# Altium PCB minibot_v1.PcbDoc (part 1 of 2)
Units mm, origin at the board's own origin, x right, y up, seen from the top; angles counter-clockwise.
Board outline 80 x 98 mm, 6 copper layers (Top Layer, GND, PWR, SIG2, GND2, Bottom Layer), stack 1.583 mm thick; 97 components, 104 nets, 461 pads, 159 vias.
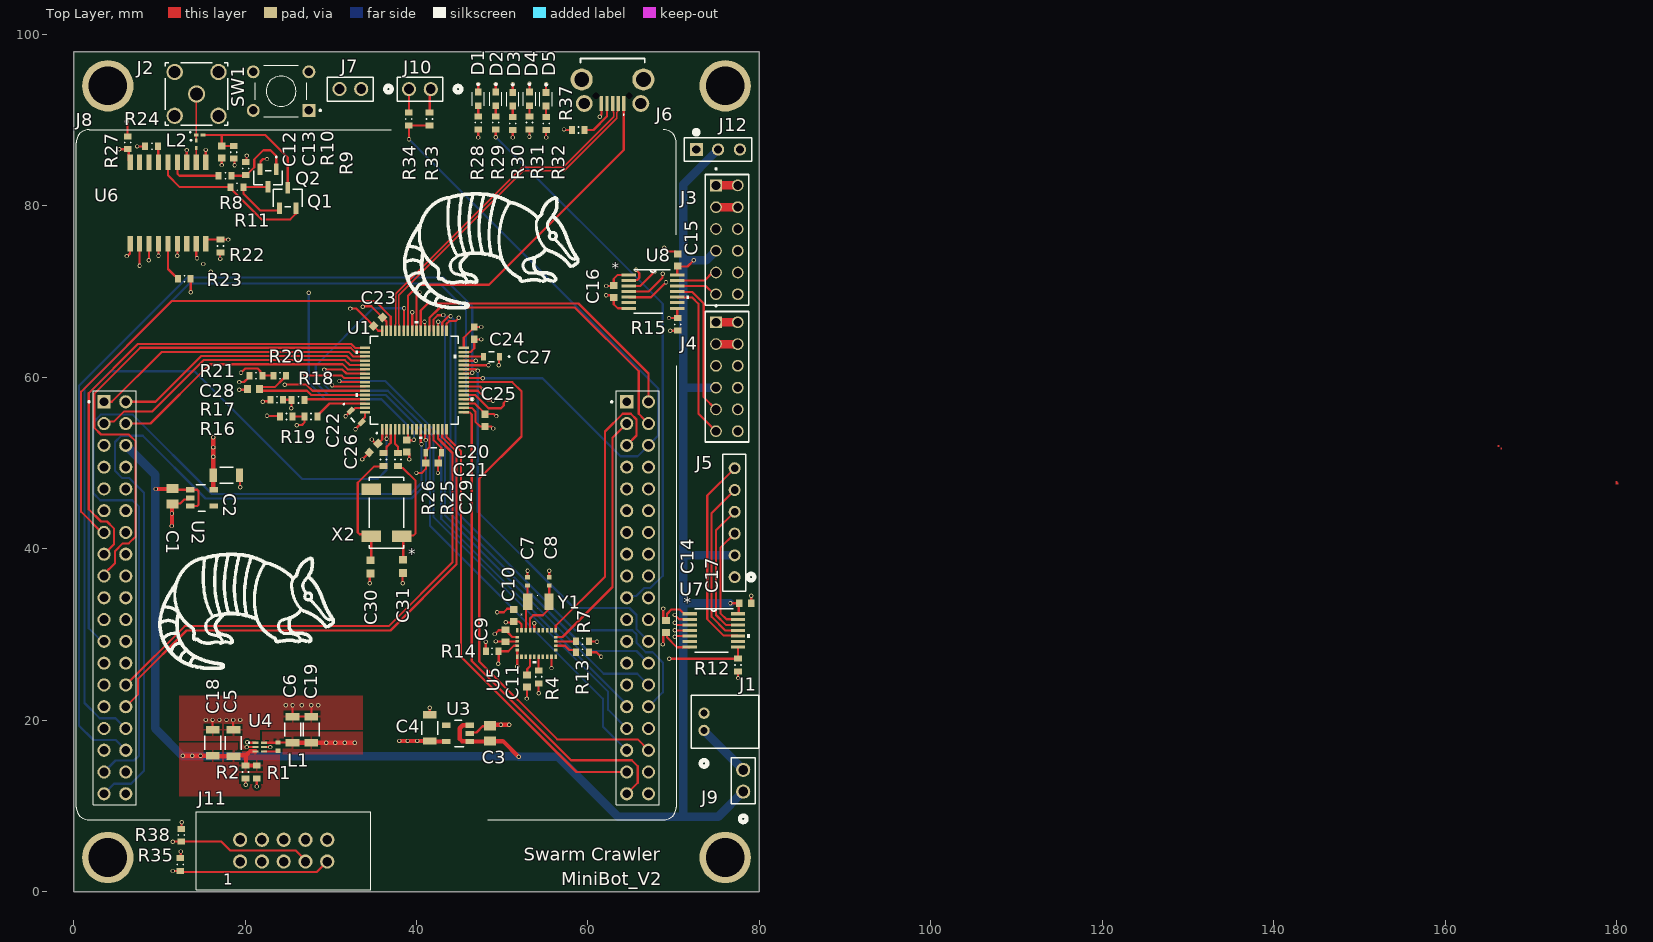
[diagram p0: Top Layer view]
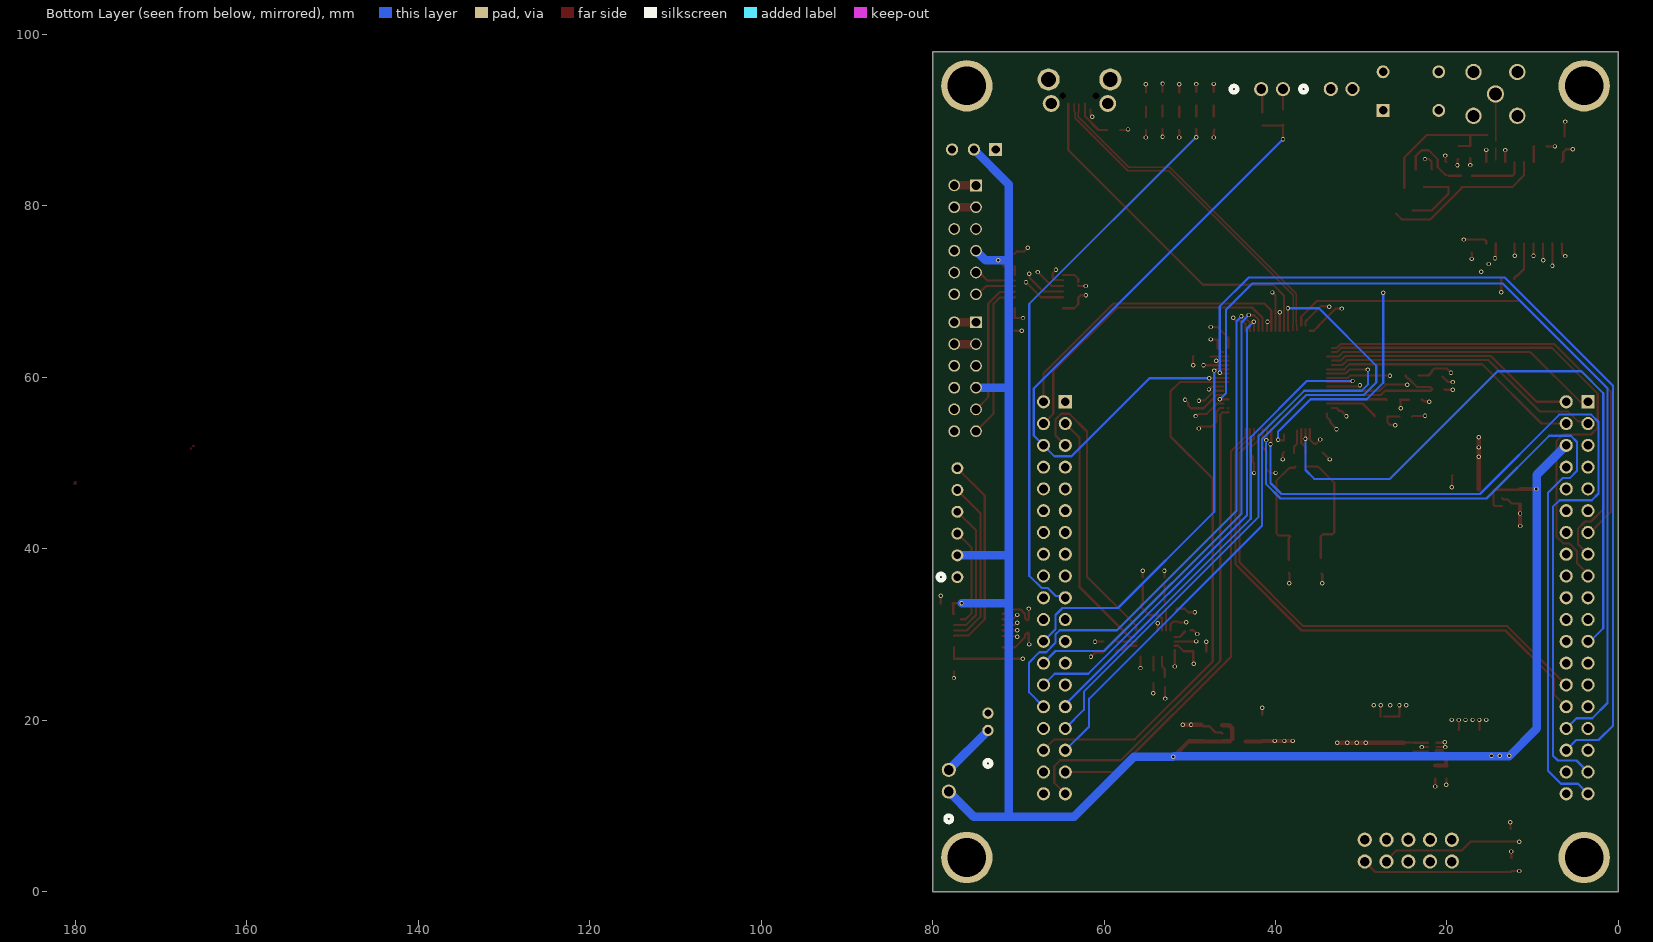
[diagram p1: Bottom Layer view, seen from below]
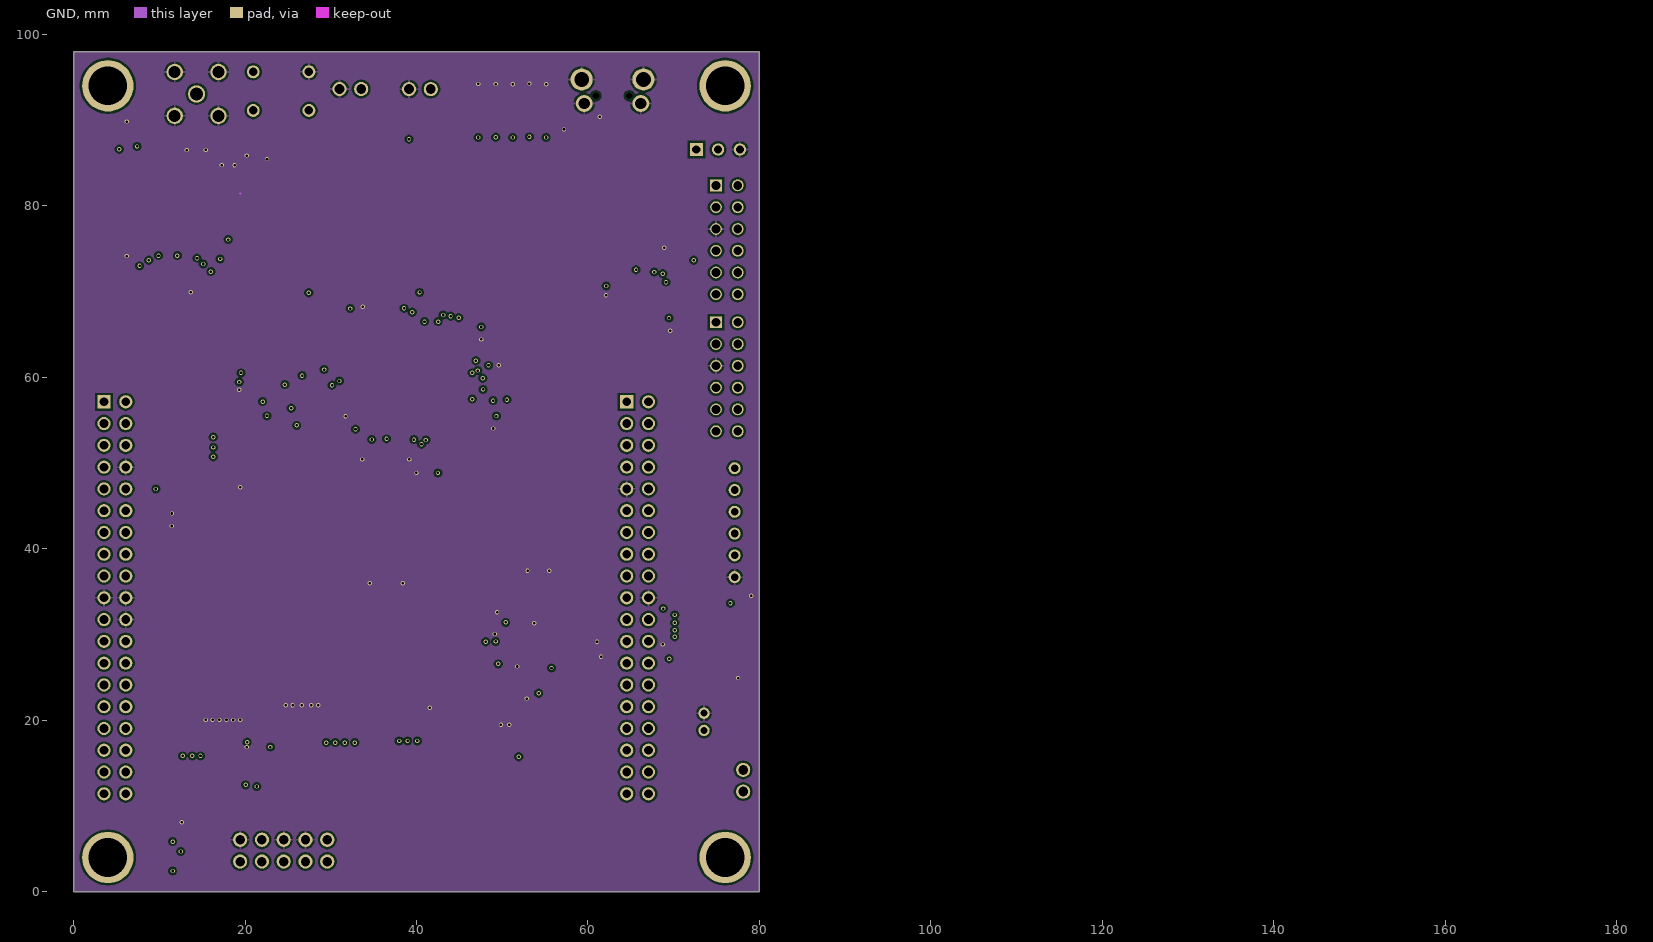
[diagram p2: GND]
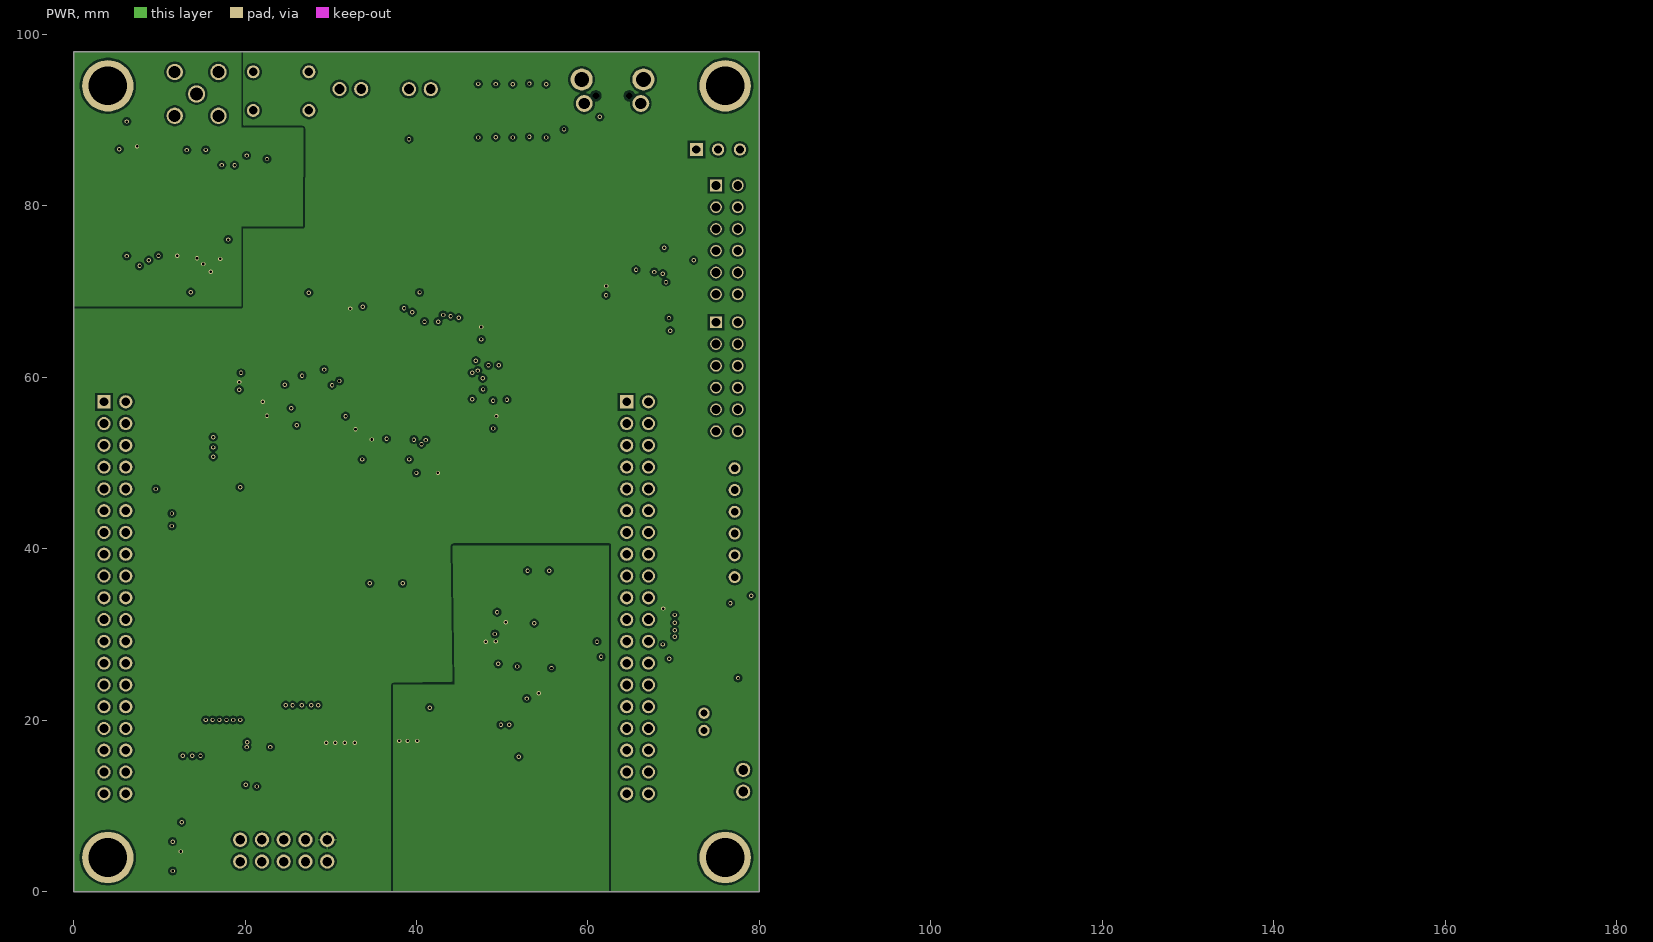
[diagram p3: PWR]
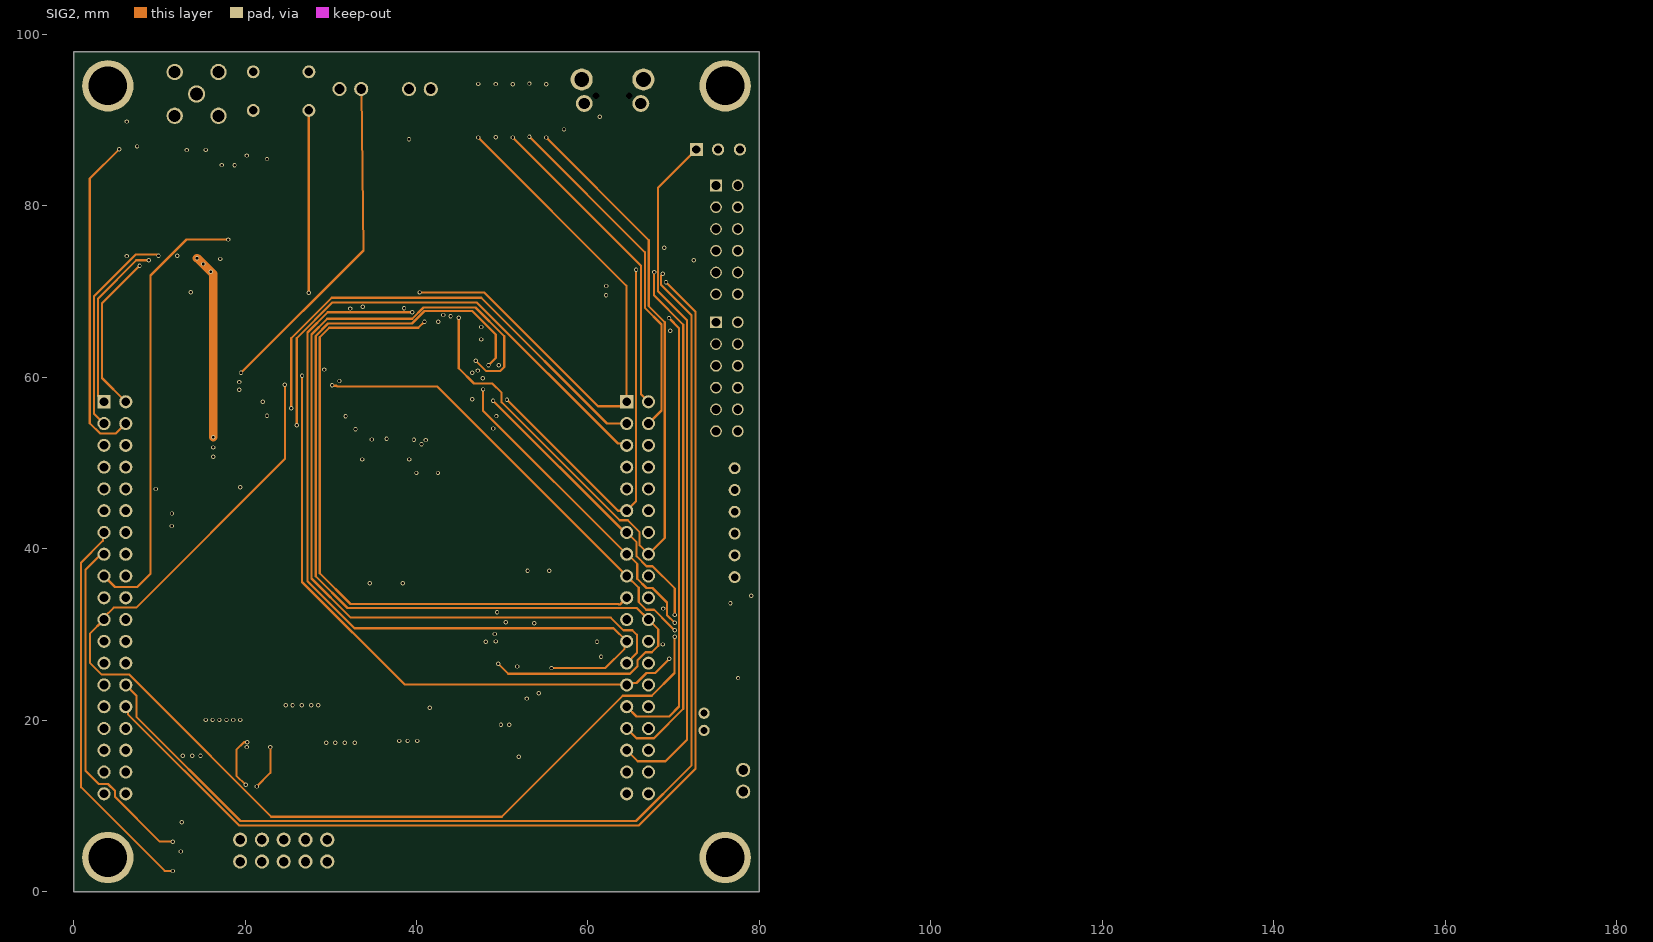
[diagram p4: SIG2]
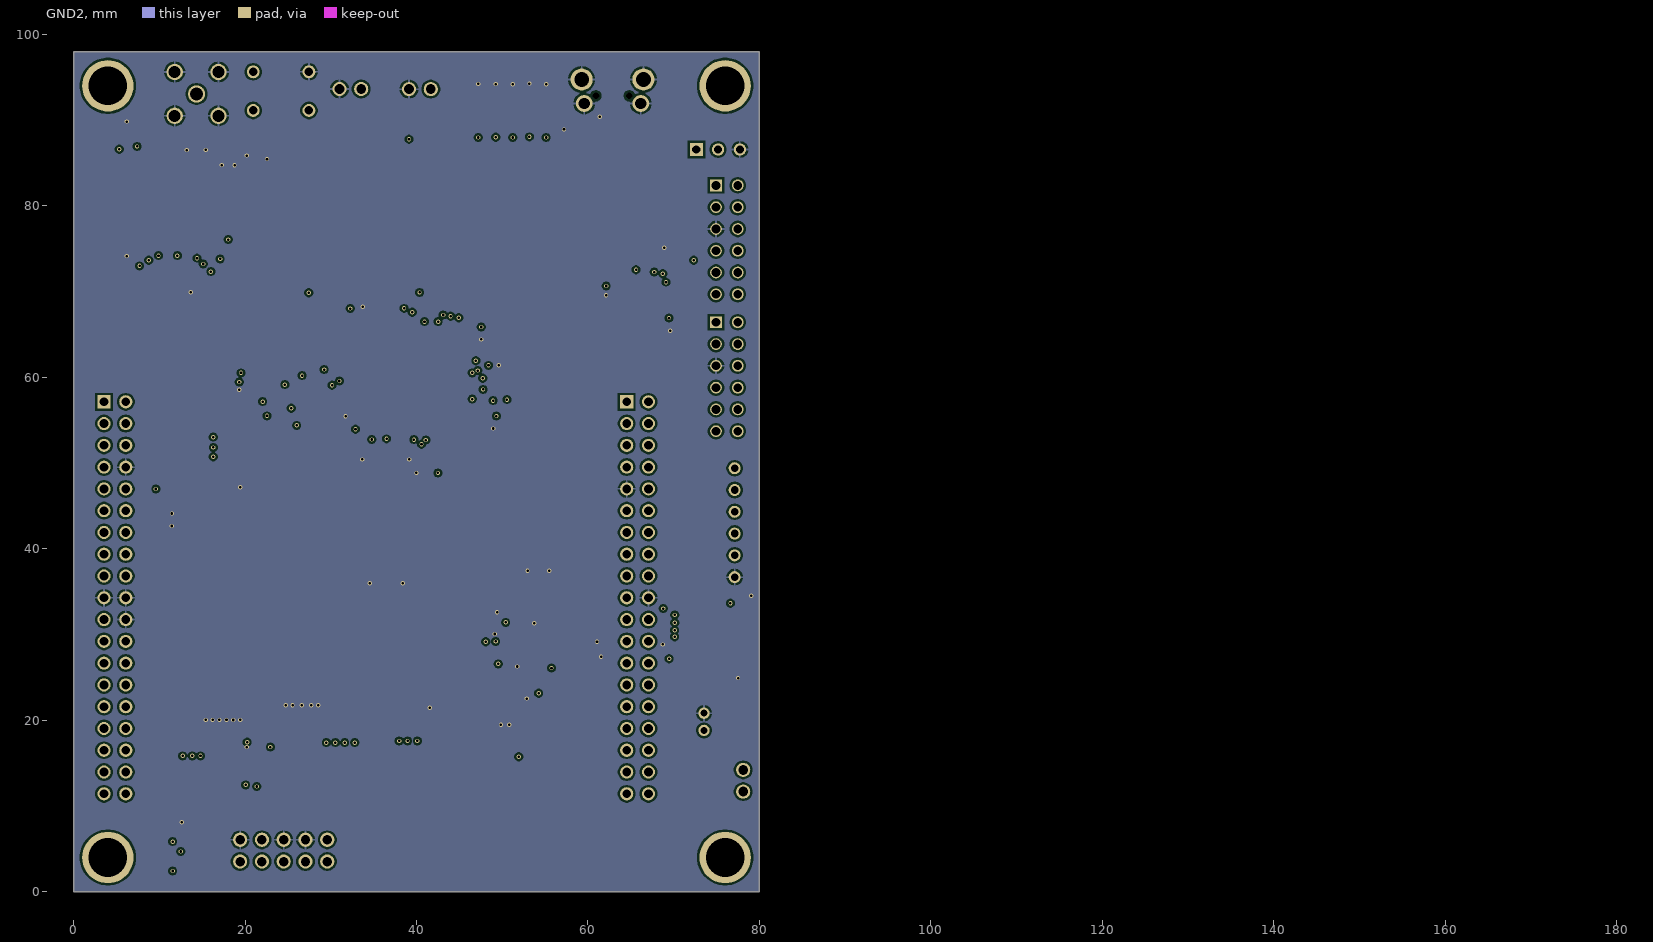
[diagram p5: GND2]

## Layer stack, top to bottom
Top Solder: solder mask 0.0102, Solder Resist, Dk 3.5
Top Layer: signal copper 0.0356
Dielectric 1: prepreg 0.2032, PP-006, Dk 4.1
GND: signal copper 0.035
Dielectric 2: core 0.381, PP-006, Dk 4.8
PWR: signal copper 0.035
Dielectric 3: prepreg 0.2032, FR-4, Dk 4.1
SIG2: signal copper 0.035
Dielectric 4: core 0.381, PP-006, Dk 4.8
GND2: signal copper 0.035
Dielectric 5: prepreg 0.2032, PP-006, Dk 4.1
Bottom Layer: signal copper 0.0356
Bottom Solder: solder mask 0.0102, Solder Resist, Dk 3.5

## Board outline
0,0 80,0 80,98 0,98

## Design rules (kind name [scope] priority, off if disabled: settings)
Clearance [All] p1: gap=0.254 ignorepadtopadclearanceinfootprint=FALSE except(0: Arc-Hole Track-Hole SMDPad-Hole THPad-Hole Via-Hole Fill-Hole Poly-Hole Region-Hole Text-Hole; 0.127: Arc-Arc Arc-Track Track-Track SMDPad-SMDPad; 0.152: SMDPad-Via; 0.2: Arc-SMDPad Track-SMDPad; 0.33: Arc-THPad Track-THPad; 0.5: THPad-THPad)
DiffPairsRouting [All] p1: maxlimit=0.254 minlimit=0.254 mostfreqgap=0.254 toplayer_mingap=0 toplayer_prefgap=0.127 toplayer_minwidth=0 toplayer_maxwidth=0.381 toplayer_prefwidth=0.254 midlayer1_minwidth=0.381 midlayer1_maxwidth=0.381 midlayer1_prefwidth=0.381 midlayer2_minwidth=0.381 midlayer2_maxwidth=0.381 midlayer2_prefwidth=0.381 midlayer3_minwidth=0.381 midlayer3_maxwidth=0.381 midlayer3_prefwidth=0.381 midlayer4_minwidth=0.381 midlayer4_maxwidth=0.381 midlayer4_prefwidth=0.381 bottomlayer_mingap=0 bottomlayer_minwidth=0 bottomlayer_maxwidth=0.381 bottomlayer_prefwidth=0.381 maxuncoupledlength=12.7
HoleSize HoleSize_2 [All] p1: absolutevalues=TRUE maxlimit=6.2 minlimit=0.2 maxpercent=80.000 minpercent=20.000
HoleSize [IsVia] p2: absolutevalues=TRUE maxlimit=6.2 minlimit=0.2 maxpercent=80.000 minpercent=20.000
MatchedLengths [All] p1: tolerance=25.4 checknetsindiffpair=TRUE checkdiffpairvsdiffpair=FALSE checkxsignals=FALSE checkothers=FALSE
MinimumAnnularRing [All] p1: minimumring=0.1
MinimumSolderMaskSliver [All] p1: minsoldermaskwidth=0.05
PolygonConnect [All] p1: thpad.connectstyle=Relief thpad.reliefconductorwidth=0.254 thpad.reliefentries=4 thpad.polygonreliefangle="90 Angle" thpad.airgapwidth=0.254 smdpad.connectstyle=Relief smdpad.reliefconductorwidth=0.254 smdpad.reliefentries=4 smdpad.polygonreliefangle="90 Angle" smdpad.airgapwidth=0.254 via.connectstyle=Direct via.reliefconductorwidth=0.254 via.reliefentries=4 via.polygonreliefangle="90 Angle" via.airgapwidth=0.254
RoutingVias [All] p1: holewidth=0.3 width=0.5 viastyle="Through Hole" minholewidth=0.2 minwidth=0.4 maxholewidth=6.35 maxwidth=6.35
SilkToSilkClearance [All] p1: silktosilkclearance=0.1
SolderMaskExpansion [All] p1: expansion=0.05 istentingtop=FALSE
Width [All] p1: maxlimit=1 minlimit=0.09 preferedwidth=0.254
26 further rules are at their usual default settings.

## Classes and differential pairs
component class Nucleo: J8
component class Sensor: C7 C8 C9 C10 C11 C12 C13 L2 Q1 Q2 R4 R7 R8 R9 R10 R11 R13 R14 R22 R23 R24 R27 U5 U6 Y1
component class Power: C1 C2 C3 C4 C5 C6 C14 C15 C16 C17 C18 C19 L1 R1 R2 R12 R15 U2 U3 U4 U7 U8
component class microController: C20 C21 C22 C23 C24 C25 C26 C27 C28 C29 C30 C31 J7 R16 R17 R18 R19 R20 R21 R25 R26 SW1 U1 X2
component class Connectors: D1 D2 D3 D4 D5 J1 J2 J3 J4 J5 J6 J9 J10 J11 J12 R28 R29 R30 R31 R32 R33 R34 R35 R37 R38
differential pair D: +D_P -D_N

## Components (designator, comment, footprint, x,y, rotation, side; value= is the part's Value field where it differs from the comment)
C1 "GRM21BR71C475KE51L" CAP_GRM0805_2X1P25_MUR 11.525,46.128 r90 top
C2 "CL31B106KOHNNWE" CAP_CL31_SAM 17.834,48.578 r180 top
C3 "GRM21BR71C475KE51L" CAP_GRM0805_2X1P25_MUR 48.546,18.474 r270 top
C4 "CL31B106KOHNNWE" CAP_CL31_SAM 41.561,19.124 r270 top
C5 "CL31B106KOHNNWE" CAP_CL31_SAM 18.65,17.357 r270 top
C6 "CL31B106KOHNNWE" CAP_CL31_SAM 25.55,18.908 r270 top
C7 "CBR04C220F5GAC" CAPC10555_55N_KEM 52.95,36.204 r90 top
C8 "CBR04C220F5GAC" CAPC10555_55N_KEM 55.475,36.202 r90 top
C9 "0603" 1608[0603] 50.374,29.858 r270 top value=100nF
C10 "0603" 1608[0603] 51.354,32.212 r270 top value=120nF
C11 "0603" 1608[0603] 52.899,24.592 r90 top value=1uF
C12 "C0603C0G1E270J030BA" CAP_0603_TDK 14.313,87.184 r270 top
C13 "0603" 1608[0603] 17.284,86.275 r90 top value=27pF
C14 "0603" 1608[0603] 69.095,30.952 r90 top value=.1uF
C15 "0603" 1608[0603] 70.456,73.687 r270 top value=.1uF
C16 "0603" 1608[0603] 63.014,70.004 r90 top value=.1uF
C17 "0603" 1608[0603] 78.334,33.655 r180 top value=.1uF
C18 "no stuff" CAP_CL31_SAM 16.225,17.38 r270 top
C19 "no stuff" CAP_CL31_SAM 27.738,18.908 r270 top
C20 "C1608X5R1C105K080AA" CAP_1608_TDK 42,51.206 r0 top
C21 "CC0603KRX7R7BB104" CC0603N_YAG 41.817,50.025 r0 top
C22 "C1608X5R1C475K080AC" CAP_1608_TDK 32.968,55.43 r315 top
C23 "CC0603KRX7R7BB104" CC0603N_YAG 35.505,66.489 r225 top
C24 "CC0603KRX7R7BB104" CC0603N_YAG 46.736,65.151 r90 top
C25 "CC0603KRX7R7BB104" CC0603N_YAG 48.006,54.991 r90 top
C26 "CC0603KRX7R7BB104" CC0603N_YAG 35,51.75 r45 top
C27 "C1608X5R1C225K080AB" CAP_1608_TDK 48.756,62.42 r180 top
C28 "Cap Semi" 1608[0603] 20.989,58.629 r0 top value=10nF
C29 "Cap Semi" 1608[0603] 38.849,51.975 r90 top value=.1uF
C30 "GRM1885C1H4R3BA01D" CAPC1608X90N 34.644,37.901 r270 top
C31 "GRM1885C1H4R3BA01D" CAPC1608X90N 38.45,37.95 r270 top
D1 "150060SS75000" LED_150060SS75000 47.2,92.475 r270 top
D2 "150060SS75000" LED_150060SS75000 49.25,92.475 r270 top
D3 "150060SS75000" LED_150060SS75000 51.225,92.428 r270 top
D4 "150060SS75000" LED_150060SS75000 53.17,92.478 r270 top
D5 "150060SS75000" LED_150060SS75000 55.116,92.428 r270 top
J1 "S2B-PH-K-S(LF)(SN)" CONN_S2B-PH-K-S_JST 73.533,18.828 r90 top
J2 "RF2-04A-T-00-50-G" CONN_RF2-04A-T-00-50-G_ADM 14.351,93.054 r0 top
J3 "TSW-106-07-F-D" SAMTEC_TSW-106-07-F-D 76.2,76.036 r270 top
J4 "TSW-106-07-F-D" SAMTEC_TSW-106-07-F-D 76.2,60.071 r270 top
J5 "TSW-106-14-F-S" CON6_1X6_TU_TSW 77.102,43.053 r90 top
J6 "MCR-B-S-RA-SMT-CS14-T_R" MCRBSRASMTCS14TR 62.865,94.488 r180 top
J7 "61300211121" CONN_61300211121_WRE 33.55,93.625 r180 top
J8 "NUCLEO-F446RE" MODULE_NUCLEO-F446RE 35.306,47.64 r0 top locked
J9 "61300211121" CONN_61300211121_WRE 78.105,11.684 r90 top
J10 "61300211121" CONN_61300211121_WRE 41.665,93.613 r180 top
J11 "61201021621" 61201021621 24.511,4.8 r0 top
J12 "22284036" 22-28-4036_MOL 72.635,86.575 r180 top
L1 "1239AS-H-1R0M=P2" CAPC10555_55N_KEM 23.846,16.938 r90 top
L2 "MLG0603S36NJT000" IND_0603_TDK 14.7,88.25 r0 top
Q1 "AO3407A" SOT-23-3L_AOS 24.981,80.913 r0 top
Q2 "SMMBT3904LT1G" SOT-23-3_1P4X3P040_ONS 22.695,83.261 r180 top
R1 "0603" J1-0603 21.375,13.975 r90 top value=100K
R2 "0603" J1-0603 20.05,13.975 r270 top value=470k
R4 "0603" J1-0603 54.246,25.064 r270 top value=10K
R7 "0603" J1-0603 59.34,29.21 r180 top value=0
R8 "0603" J1-0603 17.684,83.522 r180 top value=2K
R9 "0603" J1-0603 20.086,84.361 r270 top value=2.4K
R10 "0603" J1-0603 18.675,86.25 r90 top value=1M
R11 "0603" J1-0603 19.081,82.183 r180 top value=1M
R12 "0603" J1-0603 77.495,26.45 r90 top value=1.4K
R13 "0603" J1-0603 59.352,27.94 r180 top value=0
R14 "0603" J1-0603 48.832,28.054 r180 top value=10K
R15 "0603" J1-0603 70.456,66.194 r90 top value=1.4K
R16 "0603" J1-0603 24.803,55.441 r180 top value=1.4k
R17 "0603" J1-0603 23.7,57.397 r180 top value=1.4k
R18 "0603" J1-0603 26.198,57.371 r180 top value=33
R19 "0603" J1-0603 27.703,55.441 r180 top value=33
R20 "0603" J1-0603 24.053,60.198 r0 top value=100
R21 "0603" J1-0603 21.289,60.198 r180 top value=10k
R22 "Res3" J1-0603 17.145,75.311 r270 top value=10K
R23 "Res3" J1-0603 12.913,71.501 r180 top value=10K
R24 "Res3" J1-0603 9.113,86.955 r0 top value=10K
R25 "Res3" J1-0603 37.849,50.425 r270 top value=0K
R26 "Res3" J1-0603 36.153,50.425 r270 top value=0K
R27 "0603" J1-0603 6.313,87.358 r270 top value=10k
R28 "Res3" J1-0603 47.202,89.681 r90 top value=1K
R29 "Res3" J1-0603 49.25,89.681 r90 top value=1K
R30 "Res3" J1-0603 51.225,89.609 r90 top value=1K
R31 "Res3" J1-0603 53.17,89.684 r90 top value=1K
R32 "Res3" J1-0603 55.116,89.609 r90 top value=1K
R33 "Res3" J1-0603 41.522,90.125 r270 top value=220K
R34 "Res3" J1-0603 39.1,90.125 r90 top value=33K
R35 "Res3" J1-0603 12.448,3.175 r90 top value=1K
R37 "Res3" J1-0603 58.87,88.859 r0 top value=100K
R38 "Res3" J1-0603 12.548,6.604 r270 top value=1K
SW1 "1825910-2" TE_1825910-2 27.455,91.131 r180 top
U1 "STM32F446RCT6TR" LQFP64-10x10mm 39.751,59.69 r90 top
U2 "LP2981-33DBVR" DBV0005A_N 14.976,45.935 r0 top
U3 "LP2981-33DBVR" DBV0005A_N 44.841,18.474 r180 top
U4 "MP2148GQD-33-Z" QFN-1p0x1p5_MNP 21.707,16.88 r0 top
U5 "BNO055" QFN_BNO055_BOS 53.996,28.956 r0 top
U6 "GPS_FN" SL871 11.013,80.354 r90 top
U7 "TXB0104PWR" PW14 74.676,30.48 r0 top
U8 "TXB0104PWR" PW14 67.586,70.004 r0 top
X2 "ABS25-32.768KHZ-1-T" ABS25-32.768KHZ-1-T_ABR 36.501,44.196 r180 top
Y1 "ECS-.327-12.5-34B-C-TR" XTAL_ECS-.327-12.5-34B-C-TR 54.2,33.825 r180 top

## Footprints (in the part's own frame and the unit in brackets; to place one, negate y for a bottom-side part, rotate by r counter-clockwise, add the part's x,y. Pads: shape width x height; smd on the part's side, far side on the other; paste and mask are expansions set on the pad)
22-28-4036_MOL [mil]
  rect 60x60 hole 38 mask+0: A1(0,0)
  round 56 hole 36 mask+0: A2(-100,0) A3(-200,0)
  silkscreen extent -255,-89 55,54, body extent -50,-50 250,50, height 450
1608[0603] [mm] "Chip Capacitor, Body 1.6x0.8mm, IPC High Density"
  rect 0.8x0.9 smd: 1(-0.7,0) 2(0.7,0)
  body extent -0.87,-0.48 0.87,0.48, height 1.3
61201021621 [mm]
  round 1.65 hole 1.1: 1(-5.08,-1.27) 2(-5.08,1.27) 3(-2.54,-1.27) 4(-2.54,1.27) 5(0,-1.27) 6(0,1.27) 7(2.54,-1.27) 8(2.54,1.27) 9(5.08,-1.27) 10(5.08,1.27)
  silkscreen extent -10.18,-4.55 10.18,4.55
ABS25-32.768KHZ-1-T_ABR [mil]
  rect 89x53 smd paste+0 mask+0: 1(-69.89,108.27) 2(-69.89,-108.27) 3(69.89,-108.27) 4(69.89,108.27)
  silkscreen extent -80,-162 80,162, body extent 0,0 10,10, height 10
CAP_0603_TDK [mil]
  rect 18x13 smd paste+0 mask+0: 1(-17.5,0) 2(17.5,0)
  silkscreen extent -21,-27 -15,-21, body extent -13,-6 13,6, height 13
CAP_1608_TDK [mil]
  rect 22x35 smd paste+0 mask+0: 1(-36.5,0) 2(36.5,0)
  silkscreen extent -13,22 13,22, body extent -34,-17 34,17, height 35
CAP_CL31_SAM [mm]
  rect 0.856x1.6 smd paste+0 mask+0: 1(-1.528,0) 2(1.528,0)
  silkscreen extent -0.79,-0.93 0.79,0.93, body extent -1.6,-0.8 1.6,0.8, height 1
CAP_GRM0805_2X1P25_MUR [mil]
  rect 42x55 smd paste+0 mask+0: 1(-35.5,0) 2(35.5,0)
  body extent -43,-27 43,27, height 55
CAPC1608X90N [mm]
  rect 0.89x0.93 smd: 1(-0.77,0) 2(0.77,0)
  body extent -0.8,-0.4 0.8,0.4, height 0.9
CAPC10555_55N_KEM [mm]
  rect 0.503x0.55 smd paste+0 mask+0: 1(-0.477,0) 2(0.477,0)
  body extent -0.53,-0.28 0.53,0.28, height 0.55
CC0603N_YAG [mil]
  rect 34x32 smd paste+0 mask+0: 1(-28.5,0) 2(28.5,0)
  body extent -31,-16 31,16, height 28
CON6_1X6_TU_TSW [mil]
  round 55 hole 35 mask+0: 1(-250,0) 2(-150,0) 3(-50,0) 4(50,0) 5(150,0) 6(250,0)
  silkscreen extent -315,-90 315,55, body extent -300,-50 300,50, height 500
CONN_61300211121_WRE [mil]
  round 65 hole 45 mask+0: 1(0,0) 2(100,0)
  silkscreen extent -140,-55 155,55, body extent 0,0 10,10, height 10
CONN_RF2-04A-T-00-50-G_ADM [mil]
  round 79 hole 59: 1(0,0)
  round 75 hole 55 mask+0: 2(-100.5,100.5) 3(-100.5,-100.5) 4(100.5,-100.5) 5(100.5,100.5)
  silkscreen extent -143,-143 143,143, body extent 0,0 10,10, height 10
CONN_S2B-PH-K-S_JST [mil]
  round 52 hole 32 mask+0: 1(0,0) 2(78.74,0)
  silkscreen extent -167,-251 160,58, body extent 0,0 10,10, height 10
DBV0005A_N [mm]
  rect 1x0.6 smd paste+0 mask+0.051: 1(-1.375,0.95) 2(-1.375,0) 3(-1.375,-0.95) 4(1.375,-0.95) 5(1.375,0.95)
  silkscreen extent -0.62,-1.55 0.38,1.55, body extent 0,0 0.25,0.25, height 0.25
IND_0603_TDK [mm]
  rect 0.556x0.33 smd paste+0 mask+0: 1(-0.393,0) 2(0.393,0)
  silkscreen extent -1.18,0.27 -1.02,0.42, body extent -0.32,-0.17 0.32,0.17, height 0.33
J1-0603 [mm] "Chip Resistor, Body 1.6x0.8mm, IPC High Density"
  rect 0.7x0.9 smd: 1(-0.75,0) 2(0.75,0)
  body extent -0.85,-0.48 0.85,0.48, height 0.9
LED_150060SS75000 [mm]
  rect 0.8x0.8 smd: 1(-0.8,0) 2(0.8,0)
  silkscreen extent -1.8,-0.72 0.8,0.72
LQFP64-10x10mm [mm]
  rect 1.194x0.305 smd paste+0 mask+0: 1(-5.75,3.75) 2(-5.75,3.25) 3(-5.75,2.75) 4(-5.75,2.25) 5(-5.75,1.75) 6(-5.75,1.25) 7(-5.75,0.75) 8(-5.75,0.25) 9(-5.75,-0.25) 10(-5.75,-0.75) 11(-5.75,-1.25) 12(-5.75,-1.75) 13(-5.75,-2.25) 14(-5.75,-2.75) 15(-5.75,-3.25) 16(-5.75,-3.75) 33(5.75,-3.75) 34(5.75,-3.25) 35(5.75,-2.75) 36(5.75,-2.25) 37(5.75,-1.75) 38(5.75,-1.25) 39(5.75,-0.75) 40(5.75,-0.25) 41(5.75,0.25) 42(5.75,0.75) 43(5.75,1.25) 44(5.75,1.75) 45(5.75,2.25) 46(5.75,2.75) 47(5.75,3.25) 48(5.75,3.75)
  rect 0.305x1.194 smd paste+0 mask+0: 17(-3.75,-5.75) 18(-3.25,-5.75) 19(-2.75,-5.75) 20(-2.25,-5.75) 21(-1.75,-5.75) 22(-1.25,-5.75) 23(-0.75,-5.75) 24(-0.25,-5.75) 25(0.25,-5.75) 26(0.75,-5.75) 27(1.25,-5.75) 28(1.75,-5.75) 29(2.25,-5.75) 30(2.75,-5.75) 31(3.25,-5.75) 32(3.75,-5.75) 49(3.75,5.75) 50(3.25,5.75) 51(2.75,5.75) 52(2.25,5.75) 53(1.75,5.75) 54(1.25,5.75) 55(0.75,5.75) 56(0.25,5.75) 57(-0.25,5.75) 58(-0.75,5.75) 59(-1.25,5.75) 60(-1.75,5.75) 61(-2.25,5.75) 62(-2.75,5.75) 63(-3.25,5.75) 64(-3.75,5.75)
  silkscreen extent -6.85,-6.85 6.85,6.85, body extent -6,-6 6,6, height 1.6
MCRBSRASMTCS14TR [mm]
  rect 0.4x1.75 smd: 1(-1.3,2.55) 2(-0.65,2.55) 3(0,2.55) 4(0.65,2.55) 5(1.3,2.55)
  round 1.965 hole 1.31: MH1(-3.3,2.55) MH4(3.3,2.55)
  round 2.58 hole 1.72: MH2(-3.6,-0.25) MH3(3.6,-0.25)
  round 0.4 hole 0.8 unplated: MH5(-1.95,1.65) MH6(1.95,1.65)
  silkscreen extent -3.75,-2.7 3.75,3.9, body extent -10,-3.38 10,3.38, height 5.8
MODULE_NUCLEO-F446RE [mm]
  rect 1.53x1.53 hole 1.02: CN7_1(-31.75,9.51) CN10_1(29.21,9.51)
  round 1.53 hole 1.02: CN7_2(-29.21,9.51) CN7_3(-31.75,6.97) CN7_4(-29.21,6.97) CN7_5(-31.75,4.43) CN7_6(-29.21,4.43) CN7_7(-31.75,1.89) CN7_8(-29.21,1.89) CN7_9(-31.75,-0.65) CN7_10(-29.21,-0.65) CN7_11(-31.75,-3.19) CN7_12(-29.21,-3.19) CN7_13(-31.75,-5.73) CN7_14(-29.21,-5.73) CN7_15(-31.75,-8.27) CN7_16(-29.21,-8.27) CN7_17(-31.75,-10.81) CN7_18(-29.21,-10.81) CN7_19(-31.75,-13.35) CN7_20(-29.21,-13.35) CN7_21(-31.75,-15.89) CN7_22(-29.21,-15.89) CN7_23(-31.75,-18.43) CN7_24(-29.21,-18.43) CN7_25(-31.75,-20.97) CN7_26(-29.21,-20.97) CN7_27(-31.75,-23.51) CN7_28(-29.21,-23.51) CN7_29(-31.75,-26.05) CN7_30(-29.21,-26.05) CN7_31(-31.75,-28.59) CN7_32(-29.21,-28.59) CN7_33(-31.75,-31.13) CN7_34(-29.21,-31.13) CN7_35(-31.75,-33.67) CN7_36(-29.21,-33.67) CN7_37(-31.75,-36.21) CN7_38(-29.21,-36.21) CN10_2(31.75,9.51) CN10_3(29.21,6.97) CN10_4(31.75,6.97) CN10_5(29.21,4.43) CN10_6(31.75,4.43) CN10_7(29.21,1.89) CN10_8(31.75,1.89) CN10_9(29.21,-0.65) CN10_10(31.75,-0.65) CN10_11(29.21,-3.19) CN10_12(31.75,-3.19) CN10_13(29.21,-5.73) CN10_14(31.75,-5.73) CN10_15(29.21,-8.27) CN10_16(31.75,-8.27) CN10_17(29.21,-10.81) CN10_18(31.75,-10.81) CN10_19(29.21,-13.35) CN10_20(31.75,-13.35) CN10_21(29.21,-15.89) CN10_22(31.75,-15.89) CN10_23(29.21,-18.43) CN10_24(31.75,-18.43) CN10_25(29.21,-20.97) CN10_26(31.75,-20.97) CN10_27(29.21,-23.51) CN10_28(31.75,-23.51) CN10_29(29.21,-26.05) CN10_30(31.75,-26.05) CN10_31(29.21,-28.59) CN10_32(31.75,-28.59) CN10_33(29.21,-31.13) CN10_34(31.75,-31.13) CN10_35(29.21,-33.67) CN10_36(31.75,-33.67) CN10_37(29.21,-36.21) CN10_38(31.75,-36.21)
  silkscreen extent -35,-39.25 35,41.25
PW14 [mil]
  rect 66x14 smd: 1(-111,76.77) 2(-111,51.18) 3(-111,25.59) 4(-111,0) 5(-111,-25.59) 6(-111,-51.18) 7(-111,-76.77) 8(111,-76.77) 9(111,-51.18) 10(111,-25.59) 11(111,0) 12(111,25.59) 13(111,51.18) 14(111,76.77)
  silkscreen extent -88,-100 164,100, body extent -130,-101 130,101, height 47
QFN-1p0x1p5_MNP [mil]
  rect 28x10 smd paste-5 mask+0: 1(-19.5,19.68) 2(-19.5,0) 3(-19.5,-19.69) 4(19.5,-19.69) 5(19.5,0) 6(19.5,19.68)
  silkscreen extent -50,17 -47,23, body extent -21,-31 21,31, height 37
QFN_BNO055_BOS [mil]
  rect 12x21 smd paste+0 mask+0: 1(-88.58,60.5) 6(-88.58,-60.5) 7(-68.9,-60.5) 8(-49.21,-60.5) 9(-29.53,-60.5) 10(-9.84,-60.5) 11(9.84,-60.5) 12(29.53,-60.5) 13(49.21,-60.5) 14(68.9,-60.5) 15(88.58,-60.5) 20(88.58,60.5) 21(68.9,60.5) 22(49.21,60.5) 23(29.53,60.5) 24(9.84,60.5) 25(-9.84,60.5) 26(-29.53,60.5) 27(-49.21,60.5) 28(-68.9,60.5)
  rect 17x12 smd: 2(-88,29.53) 3(-88,9.84) 4(-88,-9.84) 5(-88,-29.53) 16(88,-29.53) 17(88,-9.84) 18(88,9.84) 19(88,29.53)
  silkscreen extent -17,-91 -2,-81, body extent 0,0 10,10, height 10
SAMTEC_TSW-106-07-F-D [mm]
  rect 1.37x1.37 hole 1.02: 01(-6.35,-1.27)
  round 1.37 hole 1.02: 02(-6.35,1.27) 03(-3.81,-1.27) 04(-3.81,1.27) 05(-1.27,-1.27) 06(-1.27,1.27) 07(1.27,-1.27) 08(1.27,1.27) 09(3.81,-1.27) 10(3.81,1.27) 11(6.35,-1.27) 12(6.35,1.27)
  silkscreen extent -8.37,-2.54 7.62,2.54
SL871 [mm] "SL871"
  rect 1.8x0.6 smd paste+0 mask-127: 1(-4.75,4.4) 2(-4.75,3.3) 3(-4.75,2.2) 4(-4.75,1.1) 5(-4.75,0) 6(-4.75,-1.1) 7(-4.75,-2.2) 8(-4.75,-3.3) 9(-4.75,-4.4) 10(4.75,-4.4) 11(4.75,-3.3) 12(4.75,-2.2) 13(4.75,-1.1) 14(4.75,0) 15(4.75,1.1) 16(4.75,2.2) 17(4.75,3.3) 18(4.75,4.4)
  body extent -4.85,-5.05 4.85,5.05, height 2.45
SOT-23-3_1P4X3P040_ONS [mil]
  rect 22x52 smd paste+0 mask+0: 1(-37.5,-40) 2(37.5,-40) 3(0,40)
  silkscreen extent -65,-99 65,33, body extent -60,-52 60,52, height 44
SOT-23-3L_AOS [mil]
  rect 22x52 smd paste+0 mask+0: 1(-37.5,-47) 2(37.5,-47) 3(0,47)
  silkscreen extent -66,-40 66,40, body extent -61,-59 61,59, height 49
TE_1825910-2 [mm]
  rect 1.498x1.498 / inner round 1.498 / far side rect 1.498x1.498 hole 0.99: 1(0,0)
  round 1.498 hole 0.99: 2(6.5,0) 3(0,-4.5) 4(6.5,-4.5)
  silkscreen extent -1.42,-5.25 6.24,0.74
XTAL_ECS-.327-12.5-34B-C-TR [mm]
  rect 1.1x1.9 smd: 1(-1.25,0) 2(1.25,0)
  silkscreen extent 0.08,-0.75 0.14,0.75

## Part data
C1 C3: "No Description Available", Mfr_Name=Murata, Copyright="Copyright (C) 2023 Ultra Librarian. All rights reserved.", Digi-Key_Part_Number_1=490-14466-2-ND, Digi-Key_Part_Number_2=490-14466-1-ND, Digi-Key_Part_Number_3=490-14466-6-ND, Manufacturer_Part_Number=GRM21BR71C475KE51L, RefDes=RefDes, Type=DEV
C2 C4 C5 C6: "No Description Available", Mfr_Name=Samsung, Copyright="Copyright (C) 2023 Ultra Librarian. All rights reserved.", Digi-Key_Part_Number_1=1276-3105-2-ND, Digi-Key_Part_Number_2=1276-3105-1-ND, Digi-Key_Part_Number_3=1276-3105-6-ND, Manufacturer_Part_Number=CL31B106KOHNNWE, RefDes=RefDes, Type=DEV
C7 C8: "No Description Available", Mfr_Name=Kemet, Copyright="Copyright (C) 2023 Ultra Librarian. All rights reserved.", Digi-Key_Part_Number_1=399-8827-1-ND, Digi-Key_Part_Number_2=399-8827-2-ND, Digi-Key_Part_Number_3=399-8827-6-ND, Manufacturer_Part_Number=CBR04C220F5GAC, RefDes=RefDes, Type=DEV
C9 C10 C11 C13 C14 C15 C16 C17: library part "Cap Semi", "Capacitor (Semiconductor SIM Model)", LatestRevisionDate=29-May-2009, LatestRevisionNote="IPC-7351 Footprint Added.", PackageDescription="Chip Capacitor", PackageReference=C1206, Published=8-Jun-2000, Publisher="Altium Limited"
C12 C20 C22 C27 L2: "No Description Available", Mfr_Name=TDK, Copyright="Copyright (C) 2023 Ultra Librarian. All rights reserved.", RefDes=RefDes, Type=DEV
  C12: Digi-Key_Part_Number_1=445-4661-1-ND, Digi-Key_Part_Number_2=445-4661-2-ND, Digi-Key_Part_Number_3=445-4661-6-ND, Manufacturer_Part_Number=C0603C0G1E270J030BA
  C20: Digi-Key_Part_Number_1=445-1416-1-ND, Digi-Key_Part_Number_2=445-1416-2-ND, Digi-Key_Part_Number_3=445-1416-6-ND, Manufacturer_Part_Number=C1608X5R1C105K080AA
  C22: Digi-Key_Part_Number_1=445-7478-1-ND, Digi-Key_Part_Number_2=445-7478-2-ND, Digi-Key_Part_Number_3=445-7478-6-ND, Manufacturer_Part_Number=C1608X5R1C475K080AC
  C27: Digi-Key_Part_Number_1=445-5157-1-ND, Digi-Key_Part_Number_2=445-5157-2-ND, Digi-Key_Part_Number_3=445-5157-6-ND, Manufacturer_Part_Number=C1608X5R1C225K080AB
  L2: Digi-Key_Part_Number_1=445-6298-1-ND, Digi-Key_Part_Number_2=445-6298-2-ND, Digi-Key_Part_Number_3=445-6298-6-ND, Manufacturer_Part_Number=MLG0603S36NJT000
C18 C19: library part CL31B106KOHNNWE, "No Description Available", Mfr_Name=Samsung, Copyright="Copyright (C) 2023 Ultra Librarian. All rights reserved.", Digi-Key_Part_Number_1=1276-3105-2-ND, Digi-Key_Part_Number_2=1276-3105-1-ND, Digi-Key_Part_Number_3=1276-3105-6-ND, Manufacturer_Part_Number=CL31B106KOHNNWE, RefDes=RefDes, Type=DEV
C21 C23 C24 C25 C26: "No Description Available", Mfr_Name=Yageo, Copyright="Copyright (C) 2023 Ultra Librarian. All rights reserved.", Digi-Key_Part_Number_1=311-1088-1-ND, Digi-Key_Part_Number_2=311-1088-2-ND, Digi-Key_Part_Number_3=311-1088-2-NDL, Digi-Key_Part_Number_4=311-1088-6-ND, Manufacturer_Part_Number=CC0603KRX7R7BB104, RefDes=RefDes, Type=DEV
C28 C29: "Capacitor (Semiconductor SIM Model)", LatestRevisionDate=29-May-2009, LatestRevisionNote="IPC-7351 Footprint Added.", PackageDescription="Chip Capacitor", PackageReference=C1206, Published=8-Jun-2000, Publisher="Altium Limited"
C30 C31: "SMD Capacitor C0G(EIA) with Capacitance: 4.3pF Tol. 0.1pF. Rated Voltage: 50Vdc", Package="1608 Murata", Availability=Unavailable, Check_prices=https://www.snapeda.com/parts/GRM1885C1H4R3BA01D/Murata%20Electronics%20North%20America/view-part/1775789/?ref=eda, MF=Murata, MP=GRM1885C1H4R3BA01D, Price=None, SnapEDA_Link=https://www.snapeda.com/parts/GRM1885C1H4R3BA01D/Murata%20Electronics%20North%20America/view-part/1775789/?ref=snap
D1 D2 D3 D4 D5: "Standard LEDs - SMD WL-SMCW SMDMono TpVw Waterclr 0603 SprRed", Package=None, Availability=Warning, Check_prices=https://www.snapeda.com/parts/150060SS75000/W%C3%BCrth%20Elektronik/view-part/4805427/?ref=eda, MF="WÃ¼rth Elektronik", MP=150060SS75000, Price=None, Purchase-URL=https://pricing.snapeda.com/search/part/150060SS75000/?ref=eda, SnapEDA_Link=https://www.snapeda.com/parts/150060SS75000/W%C3%BCrth%20Elektronik/view-part/4805427/?ref=snap
J1: "No Description Available", Mfr_Name=JST, Copyright="Copyright (C) 2023 Ultra Librarian. All rights reserved.", Digi-Key_Part_Number_1=455-1719-ND, Digi-Key_Part_Number_2=455-1719-NDL, Manufacturer_Part_Number=S2B-PH-K-S(LF)(SN), RefDes=RefDes, Type=DEV
J2: "No Description Available", Mfr_Name="ADAM TECHNOLOGIES INC", Copyright="Copyright (C) 2023 Ultra Librarian. All rights reserved.", Digi-Key_Part_Number_1=2057-RF2-04A-T-00-50-G-ND, Manufacturer_Part_Number=RF2-04A-T-00-50-G, RefDes=RefDes, Type=DEV
J3 J4: Package=None, Availability=Unavailable, MF=Samtec, MP=TSW-106-07-F-D, Price=None
J5: "No Description Available", Mfr_Name="Samtec Inc", Copyright="Copyright (C) 2023 Ultra Librarian. All rights reserved.", Digi-Key_Part_Number_1=SAM15379-ND, Digi-Key_Part_Number_2=TSW-106-14-F-S-ND, Manufacturer_Part_Number=TSW-106-14-F-S, RefDes=RefDes, Type=DEV
J6: "USB - micro B Receptacle Connector 5 Position Surface Mount, Right Angle", Arrow Part Number=MCR-B-S-RA-SMT-CS14-T/R, Manufacturer_Name="Adam Tech", Arrow Price/Stock=https://www.arrow.com/en/products/mcr-b-s-ra-smt-cs14-tr/adam-tech?region=nac, Datasheet Link=https://app.adam-tech.com/products/download/data_sheet/195344/mcr-b-s-ra-smt-cs14-t-r-data-sheet.pdf, Geometry.Height=3.1mm, Manufacturer_Part_Number=MCR-B-S-RA-SMT-CS14-T/R
J7 J9 J10: "No Description Available", Mfr_Name="Wurth Electronics", Copyright="Copyright (C) 2023 Ultra Librarian. All rights reserved.", Manufacturer_Part_Number=61300211121, RefDes=RefDes, Type=DEV
J8: "STM32 Nucleo-64 development board with STM32F446RET6 MCU, supports Arduino and ST morpho connectivity", Package=None, Availability=Unavailable, MP=NUCLEO-F446RE, Price=None
J11: "Connector Header Through Hole 10 position 0.100 _2.54mm_", Package=None, Availability=Unavailable, MF="Wurth Electronics", MP=61201021621, Price=None, SnapEDA_Link=https://www.snapeda.com/parts/61201021621/Wurth%20Electronics%20Inc./view-part/1156232/?ref=snap
J12: "No Description Available", Mfr_Name="Molex Connector Corporation", Copyright="Copyright (C) 2023 Ultra Librarian. All rights reserved.", Manufacturer_Part_Number=22284036, RefDes=RefDes, Type=DEV
L1: "Inductor with Inductance: 1uH Tol. +/-20%, Package: 1008 _2520_", Package="2520 Murata", Digi-Key_Part_Number=490-10564-1-ND, Digi-Key_Purchase_URL=https://www.digikey.com.au/product-detail/en/murata-electronics/1239AS-H-1R0M=P2/490-10564-1-ND/5272022?utm_source=snapeda&utm_medium=aggregator&utm_campaign=symbol, MF="Murata Electronics", MP=1239AS-H-1R0M=P2, SnapEDA_Link=https://www.snapeda.com/parts/1239AS-H-1R0M%3DP2/Murata%20Electronics%20North%20America/view-part/581165/?ref=snap
Q1: "No Description Available", Mfr_Name="Alpha and Omega Semiconductor", Copyright="Copyright (C) 2023 Ultra Librarian. All rights reserved.", Digi-Key_Part_Number_1=785-1006-2-ND, Digi-Key_Part_Number_2=785-1006-1-ND, Digi-Key_Part_Number_3=785-1006-6-ND, Digi-Key_Part_Number_4=785-1006-2-NDL, Manufacturer_Part_Number=AO3407A, RefDes=RefDes, Type=DEV
Q2: "No Description Available", Mfr_Name=onsemi, Copyright="Copyright (C) 2023 Ultra Librarian. All rights reserved.", Digi-Key_Part_Number_1=SMMBT3904LT1GOSTR-ND, Digi-Key_Part_Number_2=SMMBT3904LT1GOSCT-ND, Digi-Key_Part_Number_3=SMMBT3904LT1GOSDKR-ND, Manufacturer_Part_Number=SMMBT3904LT1G, RefDes=RefDes, Type=DEV
R1 R2 R4 R7 R8 R9 R10 R11 R12 R13 R14 R15 R16 R17 R18 R19 R20 R21 R27: library part Res3, "Resistor", LatestRevisionDate=29-May-2009, LatestRevisionNote="IPC-7351 Footprint Added.", PackageDescription="Chip Resistor", PackageReference=J1-0603, Published=8-Jun-2000, Publisher="Altium Limited"
R22 R23 R24 R25 R26 R28 R29 R30 R31 R32 R33 R34 R35 R37 R38: "Resistor", LatestRevisionDate=29-May-2009, LatestRevisionNote="IPC-7351 Footprint Added.", PackageDescription="Chip Resistor", PackageReference=J1-0603, Published=8-Jun-2000, Publisher="Altium Limited"
SW1: "50 mA SPST Round Actuator 160 Gram Force Tactile Pushbutton Switch", Package=None, Availability="In Stock", Check_prices=https://www.snapeda.com/parts/1825910-2/TE+Connectivity+ALCOSWITCH+Switches/view-part/?ref=eda, EU_RoHS_Compliance=Compliant, MF="TE Connectivity", MP=1825910-2, Price=None, Purchase-URL=https://pricing.snapeda.com/search/part/1825910-2/?ref=eda, SnapEDA_Link=https://www.snapeda.com/parts/1825910-2/TE+Connectivity+ALCOSWITCH+Switches/view-part/?ref=snap
U1: "No Description Available", Mfr_Name=STMicroelectronics, Copyright="Copyright (C) 2023 Ultra Librarian. All rights reserved.", Digi-Key_Part_Number_1=497-19357-2-ND, Digi-Key_Part_Number_2=497-19357-1-ND, Digi-Key_Part_Number_3=497-19357-6-ND, Manufacturer_Part_Number=STM32F446RCT6TR, RefDes=RefDes, Type=DEV
U2 U3 U7 U8: "No Description Available", Mfr_Name="Texas Instruments", Copyright="Copyright (C) 2023 Ultra Librarian. All rights reserved.", RefDes=RefDes, Type=DEV
  U2 U3: Digi-Key_Part_Number_1=296-17360-1-ND, Digi-Key_Part_Number_2=296-17360-2-ND, Digi-Key_Part_Number_3=296-17360-6-ND, Digi-Key_Part_Number_4=2156-LP2981-33DBVR-ND, Manufacturer_Part_Number=LP2981-33DBVR
  U7 U8: Digi-Key_Part_Number_1=296-21929-1-ND, Digi-Key_Part_Number_2=296-21929-2-ND, Digi-Key_Part_Number_3=296-21929-6-ND, Manufacturer_Part_Number=TXB0104PWR
U4: "No Description Available", Mfr_Name="Monolithic Power Systems", Copyright="Copyright (C) 2023 Ultra Librarian. All rights reserved.", Digi-Key_Part_Number_1=MP2148GQD-33-Z-ND, Manufacturer_Part_Number=MP2148GQD-33-Z, RefDes=RefDes, Type=DEV
U5: "No Description Available", Mfr_Name="Bosch Sensortec", Copyright="Copyright (C) 2023 Ultra Librarian. All rights reserved.", Digi-Key_Part_Number_1=828-1058-1-ND, Digi-Key_Part_Number_2=828-1058-2-ND, Digi-Key_Part_Number_3=828-1058-6-ND, Manufacturer_Part_Number=BNO055, RefDes=RefDes, Type=DEV
X2: "No Description Available", Mfr_Name=Abracon, Copyright="Copyright (C) 2023 Ultra Librarian. All rights reserved.", Manufacturer_Part_Number=ABS25-32.768KHZ-1-T, RefDes=RefDes, Type=DEV
Y1: "32.768kHz Â±10ppm Crystal 12.5pF 70 kOhms 2-SMD, No Lead", Package="SMD-2 ECS International", Digi-Key_Part_Number=XC1968CT-ND, DigiKey-Purchase-URL=https://snapeda.com/shop?store=DigiKey&id=55051, MF="ECS Inc.", MP=ECS-.327-12.5-34B-C-TR, SnapEDA_Link=https://www.snapeda.com/parts/ECS-.327-12.5-34B-C-TR/ECS%20Inc./view-part/55051/?ref=snap

## Free pads (board coordinates)
  round 6 hole 4.5: 2(4,4) 2(4,94) 2(76,4) 2(76,94)

## Via types
v1: diameter 0.5, hole 0.3, Top Layer to Bottom Layer, 159 vias

## Nets (pads, with @x,y where several pads share a name; then routed paths per layer and width w, separated by ;. In a path a pad name is that pad's centre, name@x,y a point inside that pad or via, vN(x,y) a via of type N, cw(c..) or ccw(c..) an arc to the next point about the centre after c; other vN are vias at no path point)
1PPS_GPS: J8.CN7_3 U1.53 U6.4 | length 59.5
  Top Layer w0.254: J8.CN7_3@3.556,54.61 3.783,54.837 4.702,54.837 5.869,56.004 9.154,56.004 15.161,62.011 31.631,62.011 32.202,61.44 U1.53@33.404,61.44 ; v1(9.913,74.195) U6.4@9.913,75.604
  SIG2 w0.254: J8.CN7_3@3.556,54.61 2.396,55.77 2.396,69.449 7.286,74.339 9.702,74.339 9.846,74.195 v1(9.913,74.195)
3V3: C6.2 C14.2 C16.2 C19.2 C20.2 C21.2 C22.2 C23.2 C24.2 C25.2 C26.2 J11.10 L1.2 R16.2 R17.2 R21.2 R35.2 U1.1 U1.13 U1.19 U1.32 U1.48 U1.64 U4.6 U7.1 U8.1 | length 46.7
  Top Layer w0.254: R35.2@12.448,3.925 12.5,3.977 v1(12.5,4.7) ; v1(19.325,59.45) 19.891,59.45 R21.2@20.522,60.081 ; v1(22.054,57.168) 22.101,57.215 22.655,57.215 R17.2@22.812,57.371 ; U4.6@22.202,17.38 23.811,17.38 L1.2@23.846,17.415 ; v1(22.563,55.51) 23.984,55.51 R16.2@24.053,55.441 ; R17.2@22.848,57.397 R17.2@22.95,57.397 ; L1.2@23.782,17.421 L1.2@23.846,17.357 ; L1.2@23.864,17.397 C6.2@25.05,17.397 ; v1(32.275,68.025) 32.975,68.025 34.993,66.007 C23.2@34.993,65.977 35.53,65.44 U1.48@36.001,65.44 ; v1@32.798,17.397 v1(32.8,17.4) ; v1(32.882,53.94) 32.882,53.987 33.624,54.728 C22.2@33.624,54.775 33.624,54.96 34.001,55.337 U1.64@34.001,55.788 ; v1(34.776,52.748) 35.262,52.262 C26.2@35.512,52.262 ; C26.2@35.535,52.282 36.001,52.748 U1.1@36.001,53.94 ; U1.13@42.001,53.343 42.001,52.674 42.881,51.794 42.881,51.206 42.899,51.187 42.899,51.013 42.775,50.889 42.766,50.889 42.648,50.771 42.648,50.172 C21.2@42.472,49.996 ; U1.13@42.001,53.924 U1.13@42.001,53.94 ; v1(42.501,48.85) 42.501,49.985 C21.2@42.541,50.025 ; U1.32@45.501,63.44 45.501,64.615 46.736,65.85 C24.2@46.736,65.875 v1(47.55,65.875) ; 46.098,56.94 46.806,56.94 48.006,55.74 C25.2@48.006,55.715 49.027,55.715 49.256,55.486 v1(49.322,55.486) ; v1(62.12,70.654) 62.964,70.654 C16.2@63.014,70.704 ; 63.014,71.104 63.014,71.482 63.486,71.954 U8.1@64.767,71.954 ; v1(68.772,33.033) 68.772,31.814 68.935,31.652 69.208,31.925 69.208,32.407 69.723,32.922 70.704,32.922 71.196,32.43 U7.1@71.857,32.43
  Top Layer w0.5: C6.2@25.05,17.397 27.35,17.397 v1(31.622,17.397) v1@32.798,17.397
  other v1: 29.486,17.397 30.537,17.397
3V3_GPS: C2.2 R22.2 R24.1 U2.5 U6.6 U6.8 | length 32.7
  Top Layer w0.254: v1(7.413,86.93) 8.338,86.93 R24.1@8.363,86.955 ; v1(12.113,74.195) U6.6@12.113,75.604 ; U6.8@14.313,75.604 14.313,74.054 14.4,73.967 v1(14.4,73.9) ; v1(17.1,73.809) 17.1,74.516 R22.2@17.145,74.561
  Top Layer w0.5: v1(16.3,50.73) 16.307,50.737 v1(16.307,51.825) 16.3,51.832 v1(16.3,53.025) ; U2.5@16.307,46.928 C2.2@16.306,48.578 v1@16.306,50.73
  SIG2 w1: v1(14.4,73.9) 14.45,73.9 v1(15.129,73.221) 16.3,72.05 v1(16.3,53.025)
  other v1: 16.017,72.333
3V3_IMU: C4.2 C9.2 C10.2 R4.2 R14.2 U3.5 U5.3 U5.28 | length 13
  Top Layer w0.254: C4.2@41.561,17.596 C4.2@41.634,17.524 ; R14.2@48.082,28.054 v1(48.082,29.158) ; v1(49.232,29.198) U5.3@51.761,29.198 ; v1(50.4,31.425) 51.267,31.425 C10.2@51.354,31.512 51.951,31.512 52.246,31.217 U5.28@52.246,30.493 ; v1(54.246,23.15) R4.2@54.246,24.314
  Top Layer w0.5: v1(37.975,17.596) C4.2@41.561,17.596 ; C4.2@41.634,17.524 U3.5@43.466,17.524
  other v1: 38.957,17.596 40.1,17.596
5V: C1.2 C3.2 C5.2 C15.2 C17.2 C18.2 J3.07 J4.07 J5.2 J8.CN7_6 J9.1 J12.A2 R1.2 R2.1 U2.1 U2.3 U3.1 U3.3 U4.3 U7.14 U8.14 | length 241.2
  Top Layer w0.254: C1.2@11.47,46.975 C1.2@11.525,47.029 11.669,46.885 U2.1@13.601,46.885 14.424,46.885 14.573,46.736 14.573,45.133 14.424,44.985 U2.3@13.601,44.985 ; U8.14@70.405,71.954 70.405,72.936 C15.2@70.456,72.987 ; C15.2@70.772,72.943 70.779,72.936 71.611,72.936 v1(72.325,73.65) ; v1(76.608,33.655) C17.2@77.634,33.655 ; U7.14@77.495,32.43 77.583,32.43 C17.2@77.583,33.655
  Top Layer w0.5: v1(9.6,46.975) C1.2@11.47,46.975 ; v1(12.725,15.853) v1(13.843,15.853) 14.261,15.853 ; 14.297,15.853 v1(14.808,15.853) C18.2@16.225,15.853 ; C18.2@16.675,15.804 C5.2@18.65,15.804 ; C5.2@19.05,15.922 20.116,15.922 ; U4.3@21.211,16.38 20.575,16.38 20.116,15.922 ; R1.2@21.375,14.725 R2.1@20.05,14.725 20.116,14.791 20.116,15.922 ; U3.3@46.216,19.424 45.399,19.424 45.047,19.072 45.047,17.824 45.297,17.574 46.166,17.574 U3.1@46.216,17.524 48.498,17.524 C3.2@48.546,17.572 50.07,17.572 51.883,15.759 v1(51.919,15.759)
  PWR w0.254: J9.1@77.867,11.901 78.121,11.901 J9.1@78.121,12.065
  Bottom Layer w1: J8.CN7_6@6.096,52.07 9.525,48.641 9.525,19.053 v1(12.725,15.853) 12.761,15.817 v1@51.861,15.817 ; v1(51.919,15.759) 56.504,15.759 63.5,8.763 71.126,8.763 ; 71.126,33.154 71.126,8.763 ; 71.126,33.254 71.126,39.243 ; 71.226,33.655 v1(76.608,33.655) ; J3.07@74.784,74.741 74.809,74.716 74.809,74.645 73.814,73.65 v1(72.325,73.65) 71.126,73.65 ; J4.07@74.93,58.801 71.126,58.801 ; J12.A2@75.175,86.575 71.126,82.526 71.126,73.65 ; J5.2@77.102,39.243 71.126,39.243 ; J9.1@78.105,11.684 75.184,8.763 71.126,8.763 ; 71.126,39.243 71.126,58.801 ; 71.126,58.801 71.126,73.65
ANT: C12.1 J2.1 L2.1 | length 5.5
  Top Layer w0.147: C12.1@14.313,87.532 C12.1@14.313,87.628 J2.1@14.313,93.016
BATT_VIN: J10.1 R33.1 | length 2.8
  Top Layer w0.254: R33.1@41.547,90.875 41.547,93.495 J10.1@41.665,93.613
BATT_VOL: J8.CN10_6 R33.2 R34.1 U1.25 | length 78.2
  Top Layer w0.254: R34.1@39.1,89.375 R33.2@41.522,89.375 ; v1(39.125,87.775) R34.1@39.125,89.487 ; U1.25@45.501,59.94 45.521,59.92 47.705,59.92 v1(47.725,59.9)
  Bottom Layer w0.254: v1(39.125,87.775) 68.202,58.698 68.202,53.216 J8.CN10_6@67.056,52.07 65.786,50.8 63.8,50.8 54.7,59.9 v1(47.725,59.9)
BOOT_IMU: J8.CN10_22 R14.1 U1.28 U5.4 | length 127.5
  Top Layer w0.254: U1.28@45.501,61.44 45.521,61.42 48.38,61.42 v1(48.4,61.4) ; v1(49.534,26.584) 49.582,26.633 R14.1@49.582,28.054 50.702,28.054 51.354,28.706 U5.4@51.761,28.706
  SIG2 w0.254: v1(48.4,61.4) 49.247,62.247 49.247,65.003 46.517,67.733 40.929,67.733 39.472,66.277 29.683,66.277 28.24,64.834 28.24,36.81 31.944,33.106 65.7,33.106 J8.CN10_22@67.056,31.75 68.202,30.604 68.202,28.692 67.45,27.94 66.705,27.94 65.785,27.02 65.785,26.318 64.892,25.425 50.693,25.425 v1(49.534,26.584)
D_N: J6.2 U1.44 | length 39.9
  Top Layer w0.153: U1.44@38.001,65.44 37.976,65.465 37.976,66.177 37.942,66.211 37.942,69.592 52.469,84.119 57.26,84.119 63.38,90.24 63.38,90.916 63.442,90.978 63.442,91.865 J6.2@63.515,91.938
D_P: J6.3 U1.45 | length 39.9
  Top Layer w0.153: U1.45@37.501,65.44 37.526,65.465 37.526,66.177 37.561,66.211 37.561,69.749 52.312,84.5 57.102,84.5 62.999,90.398 62.999,90.916 62.938,90.978 62.938,91.865 J6.3@62.865,91.938
ENC_1_A_5V: J3.09 U8.13 | length 4.8
  Top Layer w0.254: U8.13@70.405,71.304 73.603,71.304 74.525,72.226 J3.09@74.78,72.226
ENC_1_B_5V: J3.11 U8.12 | length 4.8
  Top Layer w0.254: U8.12@70.405,70.654 72.685,70.654 73.744,70.654 74.712,69.686 J3.11@74.78,69.686
ENC_2_A_5V: J4.09 U8.11 | length 16.6
  Top Layer w0.254: U8.11@70.405,70.004 70.456,69.953 72.161,69.953 73.5,68.615 73.5,57.691 J4.09@74.93,56.261
ENC_2_B_5V: J4.11 U8.10 | length 18.5
  Top Layer w0.254: U8.10@70.405,69.354 70.456,69.303 72.169,69.303 72.875,68.598 72.875,55.776 J4.11@74.93,53.721
FORCE_ON_N: J8.CN7_4 R27.2 U1.54 U6.18 | length 72.1
  Top Layer w0.254: v1(5.325,86.608) R27.2@6.055,86.608 ; R27.2@6.055,86.655 6.44,86.27 6.44,85.277 U6.18@6.613,85.104 ; J8.CN7_4@6.096,54.61 8.972,54.61 15.899,61.537 31.387,61.537 31.991,60.933 33.22,60.933 33.221,60.932 U1.54@34.001,60.932
  SIG2 w0.254: v1(5.325,86.608) 1.902,83.185 1.902,54.643 3.081,53.464 4.696,53.464 4.699,53.467 4.953,53.467 J8.CN7_4@6.096,54.61